# Altium PCB RF-UNIT.PcbDoc (part 3 of 3)
Units mm, origin at the board's own origin, x right, y up, seen from the top; angles counter-clockwise.
Board outline 187 x 77 mm, 2 copper layers (Top Layer, Top, Bottom Layer, Bottom); 286 components, 158 nets, 740 pads, 1203 vias.
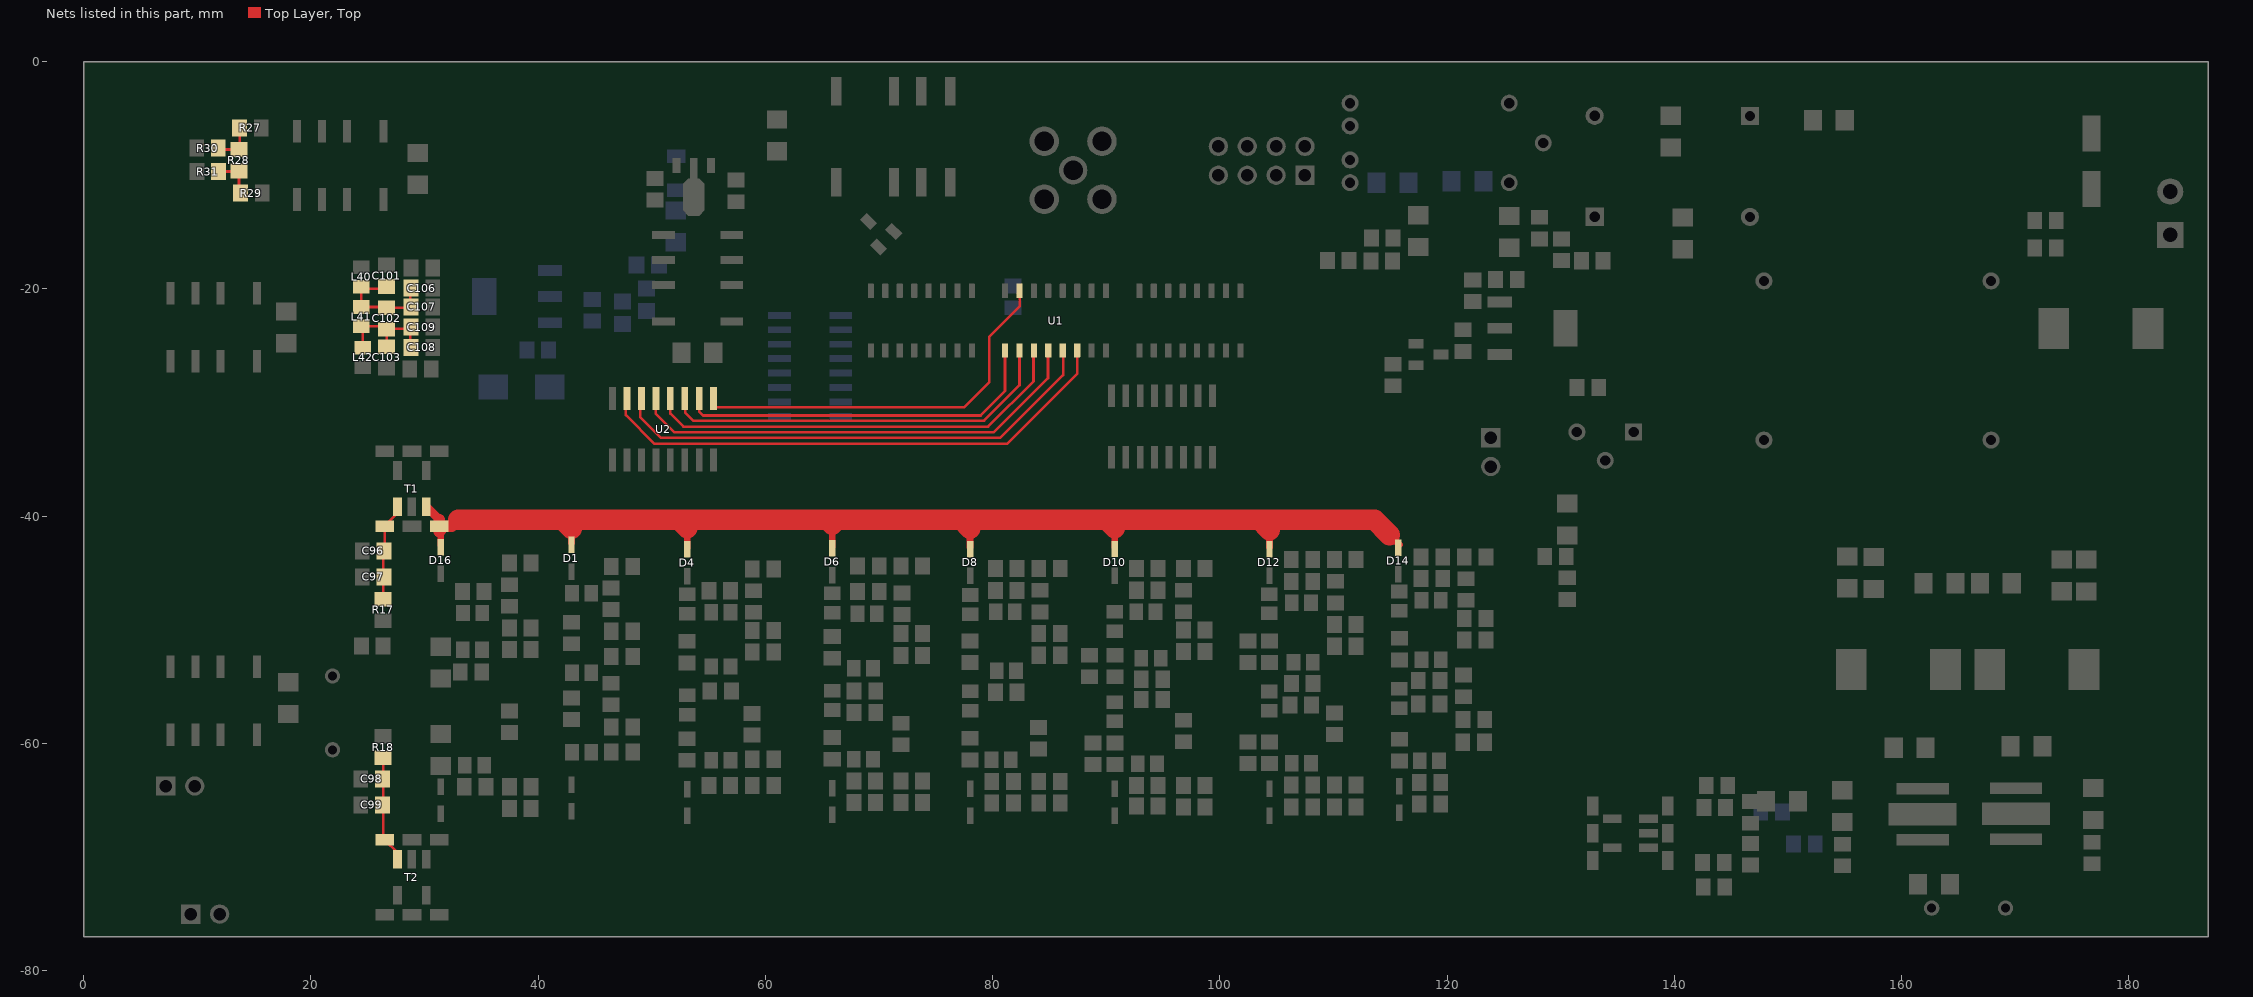
[diagram p3: the nets of this part, all layers, seen from the top]

## Via types
v1: diameter 1.016, hole 0.486, Top Layer, Top to Bottom Layer, Bottom, tented both sides, 1198 vias
v2: diameter 4, hole 3, Top Layer, Top to Bottom Layer, Bottom, 5 vias

## Nets (pads, with @x,y where several pads share a name; then routed paths per layer and width w, separated by ;. In a path a pad name is that pad's centre, name@x,y a point inside that pad or via, vN(x,y) a via of type N, cw(c..) or ccw(c..) an arc to the next point about the centre after c; other vN are vias at no path point) (continued)
"Сеть 222": D1.2 D4.2 D6.2 D8.2 D10.2 D12.2 D14.2 D16.2 T1.3 T1.9 | length 105.8
  Top Layer, Top w0.6: D16.2@31.432,-42.568 T1.3@31.432,-41.233 ; D1.2@42.929,-42.375 42.929,-41.109 ; D4.2@53.122,-42.779 53.122,-41.051 ; D6.2@65.888,-42.685 65.888,-40.726 ; D8.2@78.021,-42.743 78.021,-41.088 ; D10.2@90.754,-42.738 90.754,-41.058 ; D12.2@104.367,-42.743 104.367,-41.22 ; 114.94,-41.655 115.697,-42.412 D14.2@115.799,-42.514
  Top Layer, Top w0.76: T1.9@30.162,-39.166 31.293,-40.296
  Top Layer, Top w1: 31.293,-40.296 T1.3@31.293,-40.876 ; T1.3@31.432,-41.233 31.293,-41.373 T1.3@31.293,-40.876 ; 32.968,-40.32 32.412,-40.876 T1.3@31.293,-40.876
  Top Layer, Top w1.83: 32.968,-40.32 42.14,-40.32 ; 42.929,-41.109 42.14,-40.32 ; 53.122,-41.051 52.392,-40.32 ; 65.888,-40.726 65.482,-40.32 ; 78.021,-41.088 77.253,-40.32 ; 90.754,-41.058 90.015,-40.32 ; 104.367,-41.22 103.467,-40.32 ; 114.94,-41.655 113.605,-40.32 104.367,-40.32 103.467,-40.32 ; 42.14,-40.32 42.929,-40.32 52.392,-40.32 ; 52.392,-40.32 53.122,-40.32 65.482,-40.32 ; 65.482,-40.32 77.253,-40.32 ; 77.253,-40.32 78.021,-40.32 90.015,-40.32 ; 90.015,-40.32 90.754,-40.32 103.467,-40.32
"Сеть 223": C96.2 C97.2 R17.1 T1.1 T1.7 | length 8.7
  Top Layer, Top w0.23: R17.1@26.352,-47.308 26.352,-45.339 26.352,-43.18 26.492,-43.04 T1.1@26.492,-40.876 27.622,-39.746 T1.7@27.622,-39.166
"Сеть 224": C98.2 C99.2 R18.2 T2.3 T2.9 | length 9.4
  Top Layer, Top w0.23: R18.2@26.352,-61.273 26.352,-63.182 26.352,-65.405 26.352,-68.346 T2.3@26.492,-68.486 27.622,-69.616 T2.9@27.622,-70.196
"Сеть 227": R27.2 R28.1 R30.2 | length 3.8
  Top Layer, Top w0.23: R30.2@11.855,-7.615 11.971,-7.731 R28.1@13.665,-7.731 13.727,-7.669 R27.2@13.727,-5.822
"Сеть 228": R28.2 R29.1 R31.2 | length 5.8
  Top Layer, Top w0.23: R31.2@11.865,-9.67 13.531,-9.67 13.678,-9.817 13.678,-11.564 R29.1@13.814,-11.564 13.665,-11.415 R28.2@13.665,-9.631
"Сеть 234": C101.1 C102.2 C106.2 C107.2 L40.2 L41.1 | length 10.1
  Top Layer, Top w0.23: C101.1@26.668,-20 24.65,-20 L40.2@24.447,-19.798 L41.1@24.447,-21.59 24.453,-21.595 26.67,-21.595 26.742,-21.667 28.744,-21.667 C106.2@28.744,-20.002
"Сеть 236": C102.1 C103.2 C108.2 C109.2 L41.2 L42.1 | length 9.8
  Top Layer, Top w0.23: L42.1@24.55,-25.185 24.55,-23.393 L41.2@24.447,-23.29 24.55,-23.29 26.465,-23.29 C102.1@26.67,-23.495 ; C103.2@26.668,-25.085 26.67,-25.082 C102.1@26.67,-23.495 ; C108.2@28.744,-25.082 28.76,-25.082 C109.2@28.76,-23.495 ; C102.1@26.67,-23.495 C109.2@28.76,-23.495 ; C109.2@28.76,-23.495 28.76,-23.341 C109.2@28.76,-23.495
"Сеть 243": U1.15 U2.1 | length 35.2
  Top Layer, Top w0.23: U2.1@55.445,-29.651 55.445,-30.419 77.47,-30.419 79.714,-28.176 79.714,-24.204 82.387,-21.531 82.387,-20.117 U1.15@82.363,-20.093
"Сеть 244": U1.1 U2.2 | length 32.6
  Top Layer, Top w0.23: U2.2@54.175,-29.651 54.175,-30.808 54.507,-31.14 78.943,-31.14 81.093,-28.991 U1.1@81.093,-25.493
"Сеть 245": U1.2 U2.3 | length 35.3
  Top Layer, Top w0.23: U2.3@52.905,-29.651 52.941,-29.651 52.941,-30.879 53.652,-31.591 79.247,-31.591 82.363,-28.475 U1.2@82.363,-25.493
"Сеть 246": U1.3 U2.4 | length 38.1
  Top Layer, Top w0.23: U2.4@51.635,-29.651 51.635,-30.97 52.795,-32.13 79.609,-32.13 83.602,-28.137 83.602,-25.493 U1.3@83.633,-25.493
"Сеть 247": U1.4 U2.5 | length 40.9
  Top Layer, Top w0.23: U2.5@50.365,-29.651 50.365,-31.006 51.992,-32.632 80.097,-32.632 84.876,-27.853 84.876,-25.493 U1.4@84.903,-25.493
"Сеть 248": U1.5 U2.6 | length 44.1
  Top Layer, Top w0.23: U2.6@49.095,-29.651 49,-29.746 49,-31.307 50.809,-33.116 80.671,-33.116 86.204,-27.584 86.204,-25.493 U1.5@86.173,-25.493
"Сеть 249": U1.6 U2.7 | length 46.9
  Top Layer, Top w0.23: U2.7@47.825,-29.651 47.716,-29.651 47.716,-31.104 50.249,-33.637 81.276,-33.637 87.443,-27.471 U1.6@87.443,-25.493
pads on no net: K2.5 K2.6 K2.7 T1.2 T1.5 T1.8 T2.2 T2.5 T2.8 T5.5 U2.16 U3.6 U3.7 U7.7 U7.9 U8.11 U8.12 U8.13 U8.14 U8.15
copper on no net: | length 3.4
  Top Layer, Top w0.23: 28.892,-70.196 28.892,-68.486 ; 28.892,-40.876 28.892,-39.166

## Polygon pours and split planes (outlines as drawn)
GND on Top Layer, Top "Top Layer, Top-GND" (solid, remove dead copper, pour order 2): 0.66,-0.66 186.34,-0.66 186.34,-76.34 0.66,-76.34
"Сеть 31" on Top Layer, Top "Top Layer, Top-Сеть 31" (solid, pour order 0): 127,-21 127,-26 134,-26 134,-21
GND on Bottom Layer, Bottom "Bottom Layer, Bottom-GND" (solid, remove dead copper, pour order 6): 1.259,-0.206 186.939,-0.206 186.939,-75.886 1.259,-75.886
NetC121_2 on Bottom Layer, Bottom "Bottom Layer, Bottom-Сеть 141" (solid, pour order 4): 29,-16 29,-24 39,-24 39,-16

## Keep-outs
Keep-Out Layer, Board:
  lines w0.127: 0,-77 0,0 187,0 187,-77 0,-77
  lines w0.14: 0,-77 187,-77 187,0 0,0 0,-77

## Silkscreen, mask and mechanical layers (free items; w line width, h text height)
Top Overlay, Top Silk:
  region: 110.207,-7.193 110.202,-7.248 110.188,-7.302 110.164,-7.352 110.132,-7.397 110.093,-7.436 110.048,-7.468 109.998,-7.491 109.944,-7.506 109.889,-7.511 109.834,-7.506 109.781,-7.491 109.73,-7.468 109.685,-7.436 109.646,-7.397 109.614,-7.352 109.591,-7.302 109.577,-7.248 109.572,-7.193 109.577,-7.138 109.591,-7.085 109.614,-7.034 109.646,-6.989 109.685,-6.95 109.73,-6.918 109.781,-6.895 109.834,-6.88 109.889,-6.876 109.944,-6.88 109.998,-6.895 110.048,-6.918 110.093,-6.95 110.132,-6.989 110.164,-7.034 110.188,-7.085 110.202,-7.138 110.207,-7.193
  text "ANT" at 83.644,-5.579 h2.08
  text "LNA" at 42.121,-7.084 h2.08
  text "ATT" at 5.976,-14.596 h2.08 r90
  text "LPF" at 5.309,-26.521 h2.08 r90
  text "UA3REO" at 139.403,-56.548 h2.08 r90
  text "RF-UNIT rev11" at 143.048,-57.141 h1.25 r90
  text "BPF" at 5.458,-59.56 h2.08 r90
  text "ADC" at 5.588,-67.691 h2.08
  text "15,12,10" at 52.484,-75.135 h1.67
  text "20,17" at 69.822,-75.155 h1.67
  text "HPF" at 44.777,-75.393 h1.67
  text "2m" at 34.403,-75.562 h2.08
  text "40" at 96.065,-75.689 h2.08
  text "80" at 105.505,-75.708 h2.08
  text "30" at 80.777,-75.836 h2.08
  text "160" at 112.925,-76.041 h2.08
  text "DAC" at 122.918,-76.057 h2.08

## Text inside footprints (layer, text, board x,y; h text height)
FAN_OUT: Mechanical 1, Top Assy "BOARD EDGE" at 125.479,-32.183 h0.42 r270
J2: Mechanical 1, Top Assy "BOARD EDGE" at 6.327,-62.118 h0.42
J9: Mechanical 1, Top Assy "BOARD EDGE" at 8.518,-73.394 h0.42